# EAGLE board nola2 (EAGLE 8.6.1)
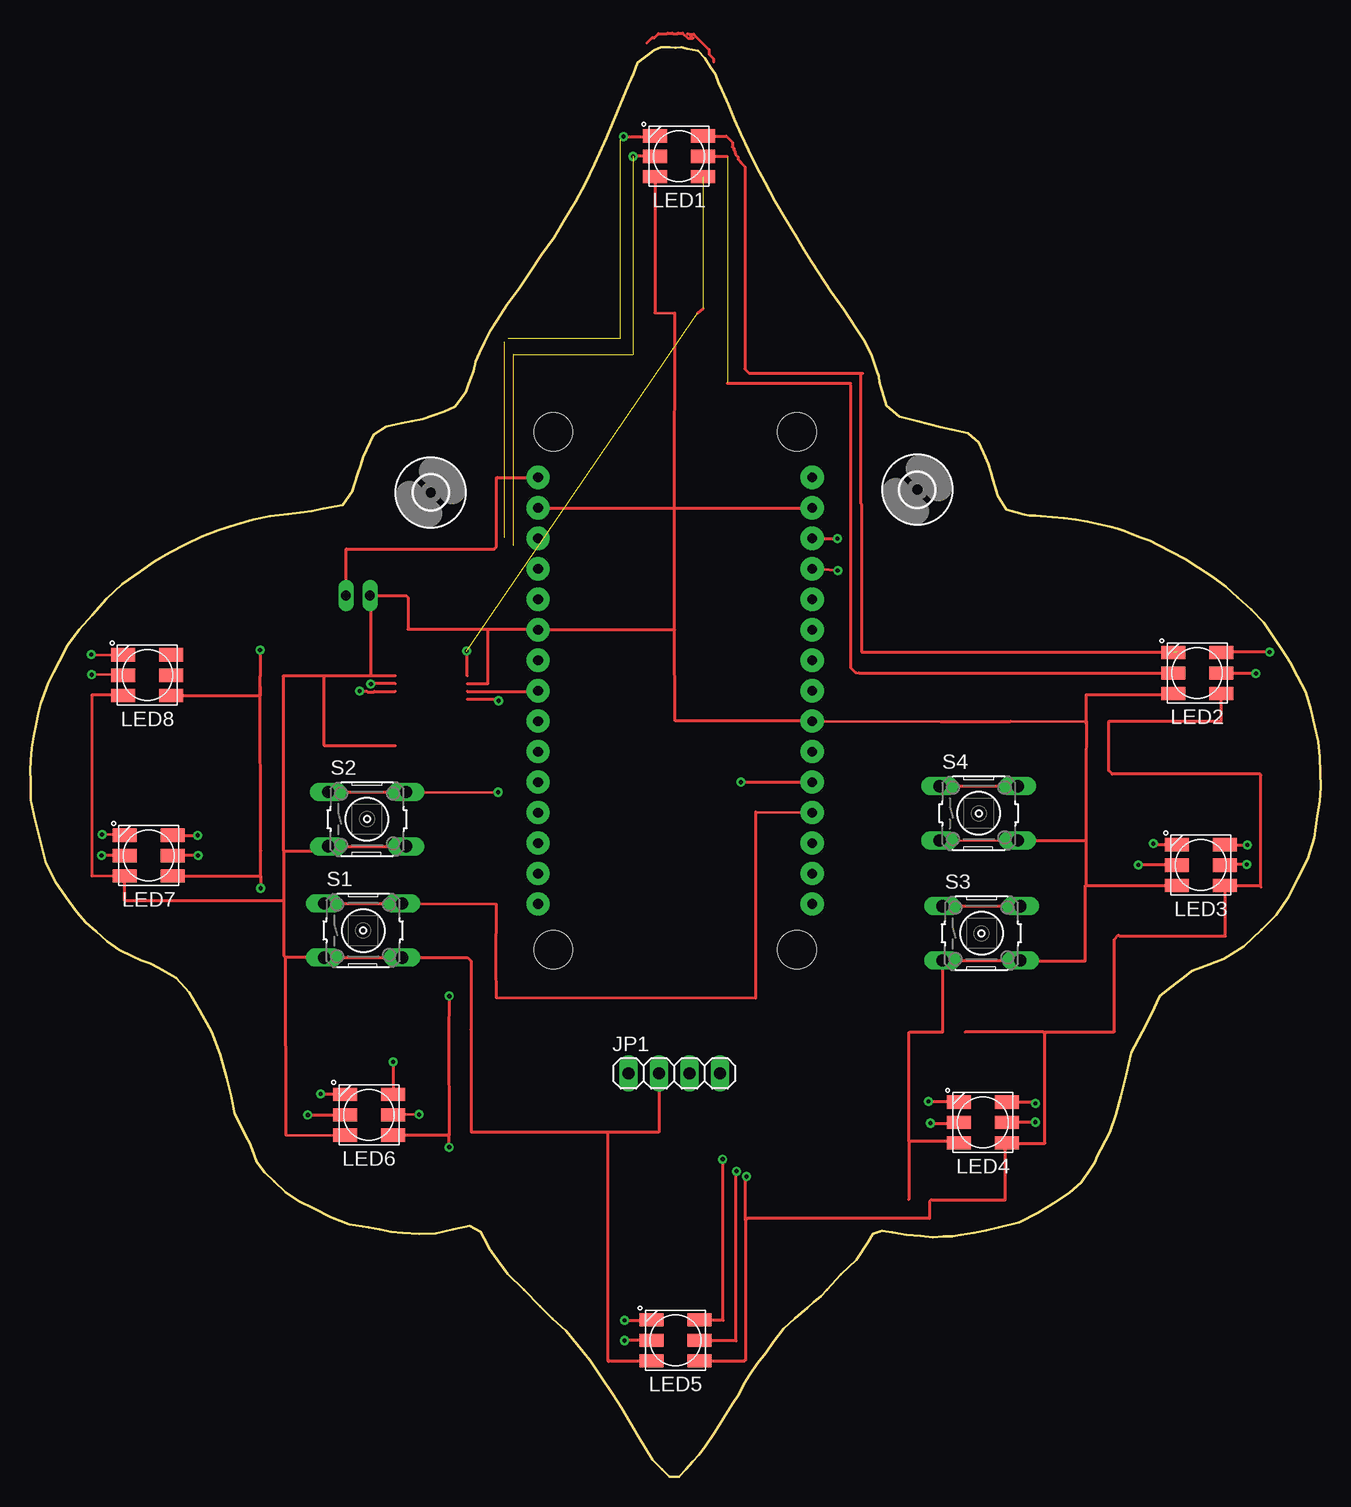
[diagram p0: board, top side]
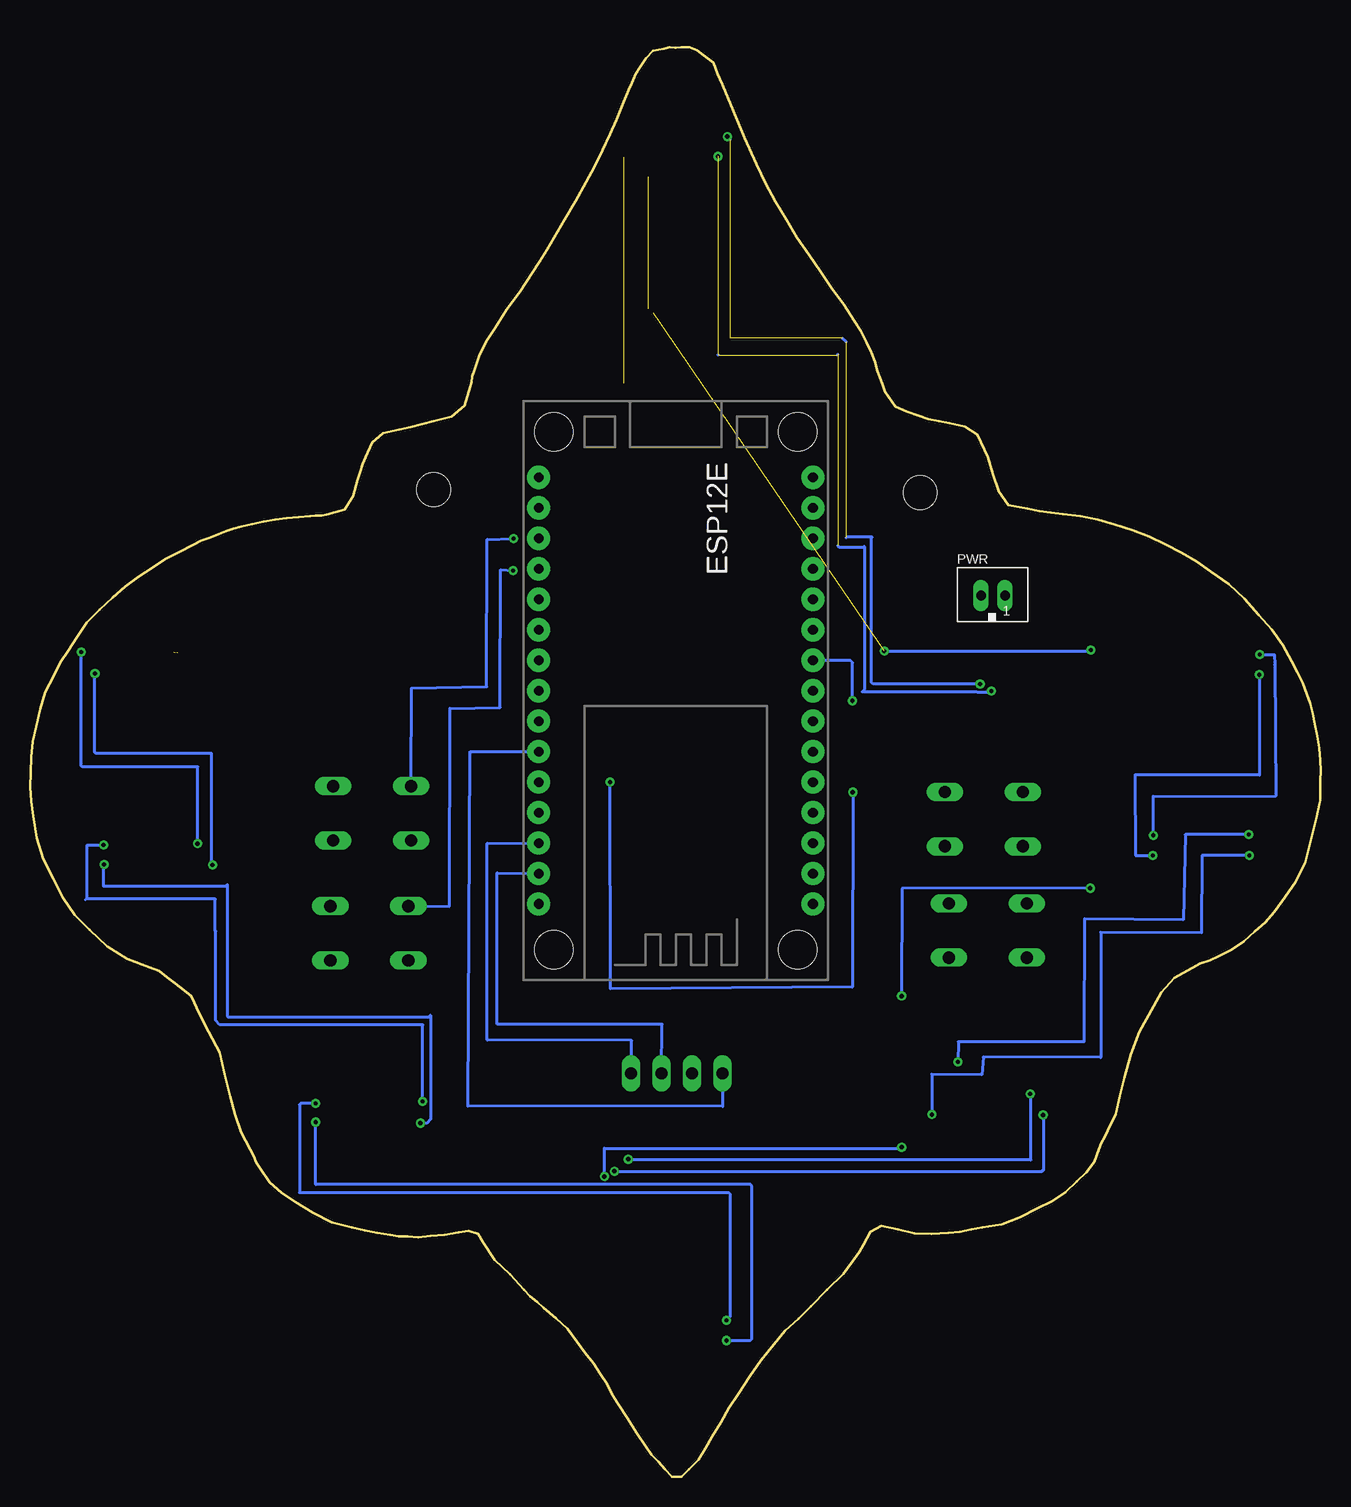
[diagram p1: board, bottom side, seen from below]

Size 107.62 x 119.16 mm. Coordinates in mm from the lower left corner, seen from the top.
Outline: 75.28,19.95 74.24,20.07 73.07,20.18 71.91,20.37 71.04,20.5 70.28,20.24 69.85,19.57 68.88,18.08 67.6,16.89 66.43,15.59 65.94,15.05 65.35,14.59 64.8,14.11 63.78,13.24 62.8,12.33 62,11.24 61.34,10.34 60.66,9.47 60.04,8.54 59.51,7.75 59.09,6.88 58.58,6.08 57.83,4.88 57.07,3.69 56.26,2.53 55.79,1.86 55.24,1.24 54.68,0.64 54.1,0 53.3,0.03 52.68,0.64 51.88,1.43 51.33,2.4 50.75,3.34 50.02,4.54 49.33,5.77 48.55,6.93 47.62,8.33 46.67,9.73 45.61,11.03 44.67,12.17 43.57,13.18 42.52,14.23 41.17,15.58 39.81,16.92 38.68,18.48 38.48,18.76 38.29,19.05 38.13,19.36 37.56,20.44 36.63,20.92 35.26,20.62 33.87,20.32 32.45,20.25 31.04,20.35 30.09,20.42 29.15,20.64 28.21,20.79 26.59,21.04 25.09,21.63 23.65,22.37 22.45,22.98 21.31,23.7 20.34,24.64 19.57,25.4 18.9,26.25 18.51,27.28 18.3,27.82 18.04,28.34 17.77,28.86 17.08,30.25 16.78,31.76 16.39,33.25 15.87,35.22 15.15,37.1 14.13,38.88 13.29,40.36 12.2,41.58 10.72,42.41 10.04,42.8 9.27,43.03 8.56,43.39 7.46,43.94 6.43,44.62 5.5,45.45 4.64,46.22 3.88,47.07 3.22,48.02 2.14,49.56 1.3,51.22 0.84,53.06 0.59,54.04 0.36,55.04 0.15,56.03 0.07,56.39 0.06,56.78 0.06,57.15 0.05,58.01 0,58.88 0.07,59.73 0.15,60.75 0.31,61.77 0.51,62.77 0.67,63.62 0.88,64.47 1.18,65.28 1.52,66.19 1.96,67.08 2.42,67.95 3.16,69.36 4.1,70.64 5.17,71.84 6.37,73.2 7.7,74.41 9.17,75.47 10.36,76.32 11.63,77.05 12.95,77.71 14.31,78.4 15.73,78.91 17.17,79.37 18.59,79.82 20.04,80.1 21.52,80.26 22.5,80.37 23.48,80.51 24.45,80.71 26.04,81.03 26.87,82.14 27.33,83.61 27.54,84.29 27.76,84.99 28.06,85.64 28.64,86.87 29.67,87.55 30.99,87.84 31.86,88.02 32.74,88.19 33.57,88.48 34.52,88.8 35.46,89.21 36.06,90.06 36.35,90.47 36.51,90.97 36.69,91.44 36.97,92.19 37.16,92.97 37.49,93.7 37.91,94.6 38.36,95.49 38.89,96.33 39.78,97.72 40.76,99.07 41.69,100.44 42.66,101.89 43.68,103.31 44.57,104.81 45.47,106.31 46.32,107.85 47.05,109.44 48.07,111.62 48.97,113.85 49.91,116.07 50.29,116.97 50.65,117.89 51.47,118.51 52.01,118.93 52.62,119.16 53.31,119.16 53.8,119.15 54.3,119.16 54.77,119.07 55.67,118.89 56.28,118.26 56.75,117.53 57.13,116.92 57.41,116.24 57.7,115.57 58.24,114.37 58.71,113.13 59.27,111.93 59.9,110.58 60.56,109.23 61.27,107.92 62.12,106.35 63.04,104.82 63.94,103.28 64.53,102.28 65.13,101.29 65.77,100.32 66.78,98.79 67.87,97.31 68.86,95.77 69.59,94.64 70.19,93.45 70.61,92.17 70.75,91.73 70.82,91.27 70.95,90.82 71.4,89.29 72.47,88.4 73.97,88 74.93,87.74 75.89,87.51 76.86,87.29 78.17,87 79.09,86.22 79.63,85.02 79.9,84.41 80.1,83.76 80.29,83.12 80.69,81.74 81.4,80.63 82.88,80.24 83.32,80.12 83.8,80.15 84.26,80.1 85.23,80 86.21,79.93 87.17,79.78 88.13,79.64 89.08,79.44 90.02,79.21 90.65,79.06 91.27,78.83 91.87,78.6 92.61,78.32 93.35,78.04 94.06,77.68 95.19,77.1 96.33,76.52 97.4,75.82 98.55,75.06 99.68,74.23 100.71,73.31 101.82,72.32 102.87,71.23 103.71,69.98 104.4,68.94 105.08,67.88 105.65,66.77 106.34,65.44 106.78,64.02 107.11,62.55 107.39,61.29 107.52,60.02 107.57,58.74 107.62,57.51 107.52,56.31 107.33,55.1 107.05,53.26 106.5,51.52 105.68,49.86 104.9,48.28 103.9,46.85 102.63,45.61 101.19,44.21 99.51,43.19 97.63,42.45 96.87,42.16 96.17,41.63 95.51,41.12 94.18,40.07 93.48,38.56 92.71,37.1 91.81,35.4 91.41,33.54 90.92,31.71 90.52,30.18 90.01,28.7 89.26,27.3 88.97,26.77 88.75,26.2 88.42,25.7 87.66,24.57 86.64,23.67 85.5,22.94 84.03,22.01 82.48,21.22 80.79,20.8 79.74,20.53 78.67,20.35 77.61,20.18 76.88,20.07 76.15,20.03 75.28,19.95
Copper layers (1*16): Top 0.035mm / dielectric 1.5mm / Bottom 0.035mm
Design rules "default": minimum track width 6mil, minimum drill 0.35mm, track to track 6mil, track to pad 6mil, pad to pad 6mil, via to via 6mil, smd to smd 6mil, copper to edge 40mil, drill to drill 6mil, minimum pad ring 10mil, minimum via ring 8mil, stop-mask expansion 4mil, vias tented up to drill 0mil, thermal gap 10mil
Net classes: 0 default: clearance 0.205 mm

## Footprints (pad centres in the part's own frame; a part is rotated, then mirrored left to right if it is on the bottom)
ESP12E_DEVKIT = drill 0.8 pad 1.93: 3V3@0 -11.43,-7.62; 3V3@1 11.43,5.08; 3V3@2 11.43,-17.78; AD0 -11.43,17.78; CLK -11.43,-2.54; CMD -11.43,2.54; D0 11.43,17.78; D1 11.43,15.24; D2 11.43,12.7; D3 11.43,10.16; D4 11.43,7.62; D5 11.43,0; D6 11.43,-2.54; D7 11.43,-5.08; D8 11.43,-7.62; EN -11.43,-10.16; GND@0 -11.43,-5.08; GND@1 -11.43,-15.24; GND@2 11.43,2.54; GND@3 11.43,-15.24; RST -11.43,-12.7; RSV@0 -11.43,15.24; RSV@1 -11.43,12.7; RX 11.43,-10.16; SD0 -11.43,0; SD1 -11.43,5.08; SD2 -11.43,7.62; SD3 -11.43,10.16; TX 11.43,-12.7; VIN -11.43,-17.78 | hole 3.2: -10.16,21.59; 10.16,21.59; 10.16,-21.59; -10.16,-21.59
1X04 = drill 1.016 long: 1 -3.81,0; 2 -1.27,0; 3 1.27,0; 4 3.81,0
APA102_5050 = smd 2 x 1.1: 1 2,-1.7; 2 2,0; 3 2,1.7; 4 -2,1.7; 5 -2,0; 6 -2,-1.7
JST_B2B-PH_HEADER = drill 0.8 long: P1 1.075,0.048; P2 -0.925,0.048
B3F-10XX = drill 1.016 long: 1 -3.251,2.261; 2 3.251,2.261; 3 -3.251,-2.261; 4 3.251,-2.261
2,8 = hole 2.8: 0,0

## Placement (x,y rotation side)
ESP12E  ESP12E_DEVKIT  [ESP12E_DEVKIT]  53.78,65.54 180 bottom
JP1  OLED  [1X04]  53.7,33.64 0 top
LED1  APA1025050  [APA102_5050]  54.1,110.08 0 top
LED2  APA1025050  [APA102_5050]  97.29,67.01 0 top
LED3  APA1025050  [APA102_5050]  97.61,50.99 0 top
LED4  APA1025050  [APA102_5050]  79.43,29.55 0 top
LED5  APA1025050  [APA102_5050]  53.8,11.39 0 top
LED6  APA1025050  [APA102_5050]  28.25,30.19 0 top
LED7  APA1025050  [APA102_5050]  9.9,51.79 0 top
LED8  APA1025050  [APA102_5050]  9.79,66.83 0 top
PWR  JST-PH_2-PIN_HEADER  [JST_B2B-PH_HEADER]  27.41,73.42 0 bottom
S1  left  [B3F-10XX]  27.77,45.55 0 top
S2  back  [B3F-10XX]  28.1,54.83 0 top
S3  right  [B3F-10XX]  79.32,45.32 0 top
S4  fwd  [B3F-10XX]  79.09,55.32 0 top
U$1  [2,8]  33.41,82.06 0 top
U$2  [2,8]  73.97,82.3 0 top

## Library data of the parts
ESP12E = ESP12E_DEVKIT
JP1 = pinhead
LED1-LED8 = jos-ph
PWR = SRG
S1-S4 = switch-omron; MPN: B3F-1000; OC_FARNELL: 176432; OC_NEWARK: 36M3542
U$1 U$2 = holes

## Nets
+5V: LED1.1 LED2.1 LED3.1 LED4.1 LED5.1 LED6.1 LED7.1 LED8.1
GND: ESP12E.GND@0 ESP12E.GND@1 ESP12E.GND@2 ESP12E.GND@3 JP1.2 LED1.6 LED2.6 LED3.6 LED4.6 LED5.6 LED6.6 LED7.6 LED8.6 PWR.P2 S1.3 S1.4 S2.3 S2.4 S3.3 S3.4 S4.3 S4.4
N$1: LED1.3 LED2.4
N$2: LED1.2 LED2.5
N$3: LED2.3 LED3.4
N$4: LED2.2 LED3.5
N$5: LED3.3 LED4.4
N$6: LED3.2 LED4.5
N$7: LED4.3 LED5.4
N$8: LED4.2 LED5.5
N$9: LED5.3 LED6.4
N$10: LED5.2 LED6.5
N$11: LED6.3 LED7.4
N$12: LED6.2 LED7.5
N$13: LED7.3 LED8.4
N$14: LED7.2 LED8.5
N$15: LED1.4
N$16: LED1.5
N$17: ESP12E.3V3@1 JP1.1
N$18: ESP12E.D1 JP1.3
N$19: ESP12E.SD0
N$20: ESP12E.CLK
N$21: ESP12E.D2 JP1.4
N$22: ESP12E.D3 S1.1 S1.2
N$23: ESP12E.D4 S2.1 S2.2
N$24: ESP12E.RX S3.1 S3.2
N$25: ESP12E.TX S4.1 S4.2
N$26: ESP12E.VIN PWR.P1

## Tracks (layer width: path | path; a pad name or v marks a point on that pad's centre or on a via)
+5V  (via drill 0.35)  (2 unrouted)
  Top 0.254: LED8.1 19.23,65.12 19.17,66.68 | 19.17,66.68 19.17,66.73 v19.17,68.92 | LED7.1 19.23,50.11 | 19.23,50.11 19.24,52.18 19.17,66.68 | 34.9,37.24 34.91,36.68 | 34.91,36.68 34.93,28.6 | 34.93,28.6 34.93,28.47 LED6.1 | 36.44,66.78 36.44,68.82 v36.4,68.85 | 89.95,63 89.98,63 | 89.98,63 99.21,63 99.28,62.93 99.29,62.94 LED2.1 | LED3.1 99.73,49.29 | 99.73,49.29 102.48,49.29 102.62,49.15 102.62,58.5 102.54,58.57 90.21,58.57 89.92,58.87 89.92,62.94 89.98,63 | 84.47,37.08 77.97,37.08 | 84.47,37.08 84.61,36.93 84.61,27.82 81.46,27.82 LED4.1 81.27,27.69 81.27,23.07 75.2,23.07 75.14,23.12 74.98,22.96 74.98,21.54 59.81,21.54 59.65,21.38 | 84.47,37.08 90.34,37.08 90.4,37.13 90.4,44.82 90.73,45.16 90.82,45.07 99.65,45.07 99.65,49.21 99.73,49.29 | LED5.1 59.59,9.69 59.65,9.75 | 59.65,9.75 | 59.65,21.38 59.65,9.75 | 56.1,97.4 55.65,97.03 | 19.23,50.11 v19.24,49.07 | v34.95,40.08 34.91,36.68 | 59.65,21.38 59.65,24.94 arc-90 v59.74,25.03 | v34.95,27.48 34.95,28.58 arc90 34.93,28.6
  Bottom 0.254: v36.4,68.85 19.25,68.85 v19.17,68.92 | v19.24,49.07 34.91,49.03 v34.95,40.08 | v59.74,25.03 59.74,27.4 arc-90 59.74,27.4 35.03,27.4 arc-90 v34.95,27.48
GND
  Top 0.152: S4.3 S4.4 | 42.31,70.62 ESP12E.GND@0
  Top 0.254: ESP12E.GND@1 53.73,80.78 | 53.73,80.78 ESP12E.GND@3 | ESP12E.GND@0 53.73,70.62 | 53.73,70.62 53.73,80.78 | 53.73,80.78 53.75,97.03 52.09,97.04 LED1.6 | 21.14,52.18 21.15,48 | 21.15,48 7.91,48.02 LED7.6 5.17,50.05 5.17,65.2 7.07,65.2 LED8.6 | 21.26,43.32 S1.3 S1.4 36.46,43.29 36.75,42.99 36.75,37.29 36.8,37.24 36.8,28.73 36.79,28.72 48.23,28.72 | 21.26,43.32 21.32,28.49 LED6.6 | 53.73,70.62 53.78,63.01 ESP12E.GND@2 75.9,62.97 81.75,62.98 88.05,63 88.05,62.77 | 88.02,58.87 88.02,58.74 | 88.02,58.74 88.03,53.07 | S4.4 88.03,53.07 | 88.05,62.77 88.02,58.74 | PWR.P2 28.56,73.46 | 28.56,73.46 31.36,73.46 31.52,73.31 31.52,70.67 38.22,70.67 | 38.22,70.67 42.26,70.67 42.31,70.62 | 30.44,66.78 28.45,66.78 | 28.45,66.78 24.48,66.78 | 24.48,66.78 21.12,66.78 21.07,66.73 21.14,66.67 21.14,52.18 | 28.45,66.78 28.45,73.36 28.56,73.46 | 30.44,60.93 24.55,60.93 24.51,60.97 24.51,66.74 24.48,66.78 | 36.44,66.13 38.17,66.13 38.18,66.14 38.18,70.63 38.22,70.67 | 21.14,52.18 24.46,52.18 S2.3 S2.4 | 21.15,48 21.15,43.43 21.26,43.32 | JP1.2 52.43,28.73 52.43,28.72 48.23,28.72 | 48.23,28.72 48.15,28.64 48.15,9.69 48.23,9.61 48.3,9.69 LED5.6 | LED2.6 95.18,65.19 88.03,65.19 88.03,62.79 88.05,62.77 | 88.03,53.07 88.03,49.34 87.99,49.31 | 87.99,49.31 88.01,49.29 LED3.6 | 87.99,49.31 87.97,49.29 87.97,42.99 82.63,42.99 S3.4 S3.3 76.07,37.08 | 76.07,37.08 | LED4.6 77.31,27.97 73.26,27.97 | 73.26,27.97 73.26,37.01 73.34,37.09 73.34,37.08 76.07,37.08 | 73.26,27.97 73.26,23.15 73.24,23.12
N$1  (1 unrouted)
  Top 0.254: LED1.3 58.05,111.78 58.55,111.27 58.55,110.87 58.67,110.75 58.67,110.62 58.79,110.5 58.79,110.31 58.83,110.27 58.83,110.22 59.03,110.02 59.03,109.83 59.23,109.63 59.23,109.58 59.59,109.22 59.59,92.36 59.95,91.99 69.12,91.99 | 69.12,91.99 69.41,91.99 | 95.79,68.59 95.63,68.76 69.33,68.76 69.33,81.08 69.27,81.14 69.27,91.84 69.12,91.99
N$2  (1 unrouted)
  Top 0.152: 58.13,110.08 58.13,110.01 | 68.41,91.16 68.41,90.98 | 68.87,67.02 69.1,67.02 | 95.12,67.02 LED2.5
  Top 0.254: 56.13,110.11 arc90 LED1.2 58.12,110.08 58.13,110.08 | 58.13,91.16 68.41,91.16 | 68.41,91.16 | 68.41,90.98 68.41,67.47 68.87,67.02 | 69.1,67.02 95.12,67.02
N$3  (via drill 0.35)
  Top 0.254: LED3.4 93.75,52.69 v93.65,52.79 | v103.34,68.75 99.34,68.75 LED2.3
  Bottom 0.254: v93.65,52.79 93.65,59.14 93.62,59.18 103.26,59.18 103.34,59.26 v103.34,68.75
N$4  (via drill 0.35)
  Top 0.254: LED3.5 92.42,50.99 v92.4,51.01 | v102.2,66.97 99.33,66.97 LED2.2
  Bottom 0.254: v92.4,51.01 92.48,51.08 92.48,60.32 102.13,60.32 102.2,60.39 v102.2,66.97
N$5  (via drill 0.35)
  Top 0.254: LED4.4 74.94,31.25 v74.89,31.3 | LED3.3 101.47,52.69 v101.49,52.67
  Bottom 0.254: v74.89,31.3 74.89,37.65 74.85,37.69 91.8,37.69 92.14,38.03 92.14,45.48 92.18,45.52 92.18,48.16 102.95,48.16 | v101.49,52.67 102.86,52.67 102.86,48.24 102.95,48.16 | 102.95,48.16 102.99,48.11
N$6  (via drill 0.35)
  Top 0.254: v101.45,51.05 99.66,51.05 LED3.2 | v75.07,29.49 77.37,29.49 LED4.5
  Bottom 0.254: v101.45,51.05 101.51,50.98 101.51,49.25 91.29,49.25 91.16,49.38 91.16,38.4 91.12,38.36 74.35,38.36 74.22,38.48 74.22,29.78 74.52,29.49 v75.07,29.49
N$7  (via drill 0.35)
  Top 0.254: LED4.3 83.69,31.25 v83.81,31.13 | v49.55,13.05 51.77,13.05 LED5.4
  Bottom 0.254: v83.81,31.13 85.07,31.13 85.16,31.05 85.16,23.7 49.38,23.7 49.26,23.57 49.26,13.35 v49.55,13.05
N$8  (via drill 0.35)
  Top 0.254: LED5.5 49.57,11.39 v49.55,11.36 | v83.81,29.57 81.46,29.57 LED4.2
  Bottom 0.254: v49.55,11.36 47.57,11.36 47.44,11.49 47.44,24.25 47.57,24.37 83.76,24.37 83.81,24.42 v83.81,29.57
N$9  (via drill 0.35)
  Top 0.254: LED5.3 57.75,13.09 arc-90 57.78,13.05 57.78,26.44 arc90 v57.74,26.48 | v24.24,31.92 26.22,31.92 arc-90 LED6.4
  Bottom 0.254: v57.74,26.48 24.28,26.48 arc90 24.2,26.4 24.2,31.88 arc-90 v24.24,31.92
N$10  (via drill 0.35)
  Top 0.254: LED5.2 58.81,11.39 arc-90 58.86,11.33 58.86,25.4 arc-90 58.94,25.48 v58.9,25.48 | v23.16,30.16 26.23,30.16 arc90 LED6.5
  Bottom 0.254: v58.9,25.48 23.28,25.48 arc-90 23.12,25.64 23.12,30.12 arc-90 v23.16,30.16
N$11  (via drill 0.35)
  Top 0.254: LED7.4 v6.01,53.55 | v30.28,34.6 LED6.3
  Bottom 0.254: v6.01,53.55 11.32,53.55 11.48,46.43 19.72,46.51 19.76,36.28 30.24,36.28 v30.28,34.6
N$12  (via drill 0.35)
  Top 0.254: LED7.5 v5.97,51.79 | v32.44,30.2 LED6.2
  Bottom 0.254: v5.97,51.79 9.92,51.79 9.96,45.35 18.36,45.39 18.36,34.96 28.16,35 28.28,33.52 32.44,33.56 v32.44,30.2
N$13  (via drill 0.35)
  Top 0.254: LED7.3 v13.97,53.48 | v5.11,68.55 LED8.4
  Bottom 0.254: v13.97,53.48 13.97,56.73 3.76,56.76 3.86,67.71 3.87,68.54 v5.11,68.55
N$14  (via drill 0.35)
  Top 0.254: LED8.5 v5.14,66.87 | v14,51.81 LED7.2
  Bottom 0.254: v5.14,66.87 5.14,58.49 15.5,58.52 15.47,51.81 v14,51.81
N$15  (via drill 0.35)  (3 unrouted)
  Top 0.254: 30.44,66.13 28.44,66.13 v28.41,66.1 | v49.49,111.73 52.05,111.73 LED1.4
  Bottom 0.254: v28.41,66.1 37.34,66.1 37.47,66.23 37.47,78.26 37.41,78.32 39.54,78.32 39.58,78.29 | 39.58,94.61 39.88,94.91 | 49.24,111.48 v49.49,111.73
N$16  (via drill 0.35)  (3 unrouted)
  Top 0.254: LED1.5 v50.28,110.08 v50.27,110.07 | v27.48,65.5 28.08,65.5 28.14,65.44 28.68,65.44 28.72,65.48 30.44,65.48
  Bottom 0.254: 50.27,93.55 50.24,93.52 | 40.34,93.52 40.27,93.58 | 40.27,77.62 40.17,77.52 38.11,77.52 38.08,77.56 38.08,65.63 38.24,65.46 28.71,65.46 28.68,65.44 27.6,65.44 v27.48,65.5
N$17
  Bottom 0.254: JP1.1 49.87,30.87 71.12,30.92 70.93,60.45 ESP12E.3V3@1
N$18
  Bottom 0.254: JP1.3 54.92,37.72 68.66,37.72 68.66,50.36 ESP12E.D1
N$19
  Top 0.254: 36.44,65.48 42.29,65.48 ESP12E.SD0
N$20  (via drill 0.35)
  Top 0.254: 36.44,64.83 38.92,64.83 v39.05,64.69
  Bottom 0.254: v39.05,64.69 39.05,67.88 39.23,68.06 ESP12E.CLK
N$21
  Bottom 0.254: JP1.4 57.46,36.38 69.5,36.42 69.5,52.81 ESP12E.D2
N$22
  Top 0.254: S1.1 S1.2 38.87,47.75 38.83,42.79 38.87,39.96 60.5,39.92 60.5,55.43 ESP12E.D3
N$23  (via drill 0.35)
  Top 0.254: S2.1 S2.2 v39.03,57.07 | v59.26,57.91 ESP12E.D4
  Bottom 0.254: v39.03,57.07 39.07,40.84 59.22,40.68 v59.26,57.91
N$24  (via drill 0.35)
  Top 0.254: S3.1 S3.2 | v67.34,75.54 ESP12E.RX
  Bottom 0.254: S3.1 72.66,47.55 72.62,64.06 68.42,64.15 68.38,75.62 v67.34,75.54
N$25  (via drill 0.35)
  Top 0.254: S4.1 S4.2 | ESP12E.TX v67.3,78.22
  Bottom 0.254: S4.1 75.82,65.74 69.54,65.86 69.5,78.14 v67.3,78.22
N$26
  Top 0.254: PWR.P1 26.37,77.34 | 26.37,77.34 26.39,77.35 | 26.37,77.34 38.69,77.34 38.88,77.52 38.88,83.25 38.95,83.32 ESP12E.VIN
N$27
  Top 0.254: 51.43,119.54 51.86,119.97 52.05,119.97 52.39,120.31 53.11,120.31 53.16,120.36 53.54,120.36 53.59,120.31 53.98,120.31 54.02,120.36 54.41,120.36 54.84,119.93 55.27,119.93 54.94,120.26 | 54.94,120.26 54.79,120.26 | 54.94,120.26 55.32,120.26 56.62,118.97 56.62,118.58 57,118.2 57,117.96